# Altium PCB RoboRIOSPIBreakout.PcbDoc
Units mil, origin at the board's own origin, x right, y up, seen from the top; angles counter-clockwise.
Board outline 1041.34 x 1657.48 mil, 2 copper layers (Top Layer, Bottom Layer), stack 61.756 mil thick; 24 components, 16 nets, 90 pads, 13 vias.
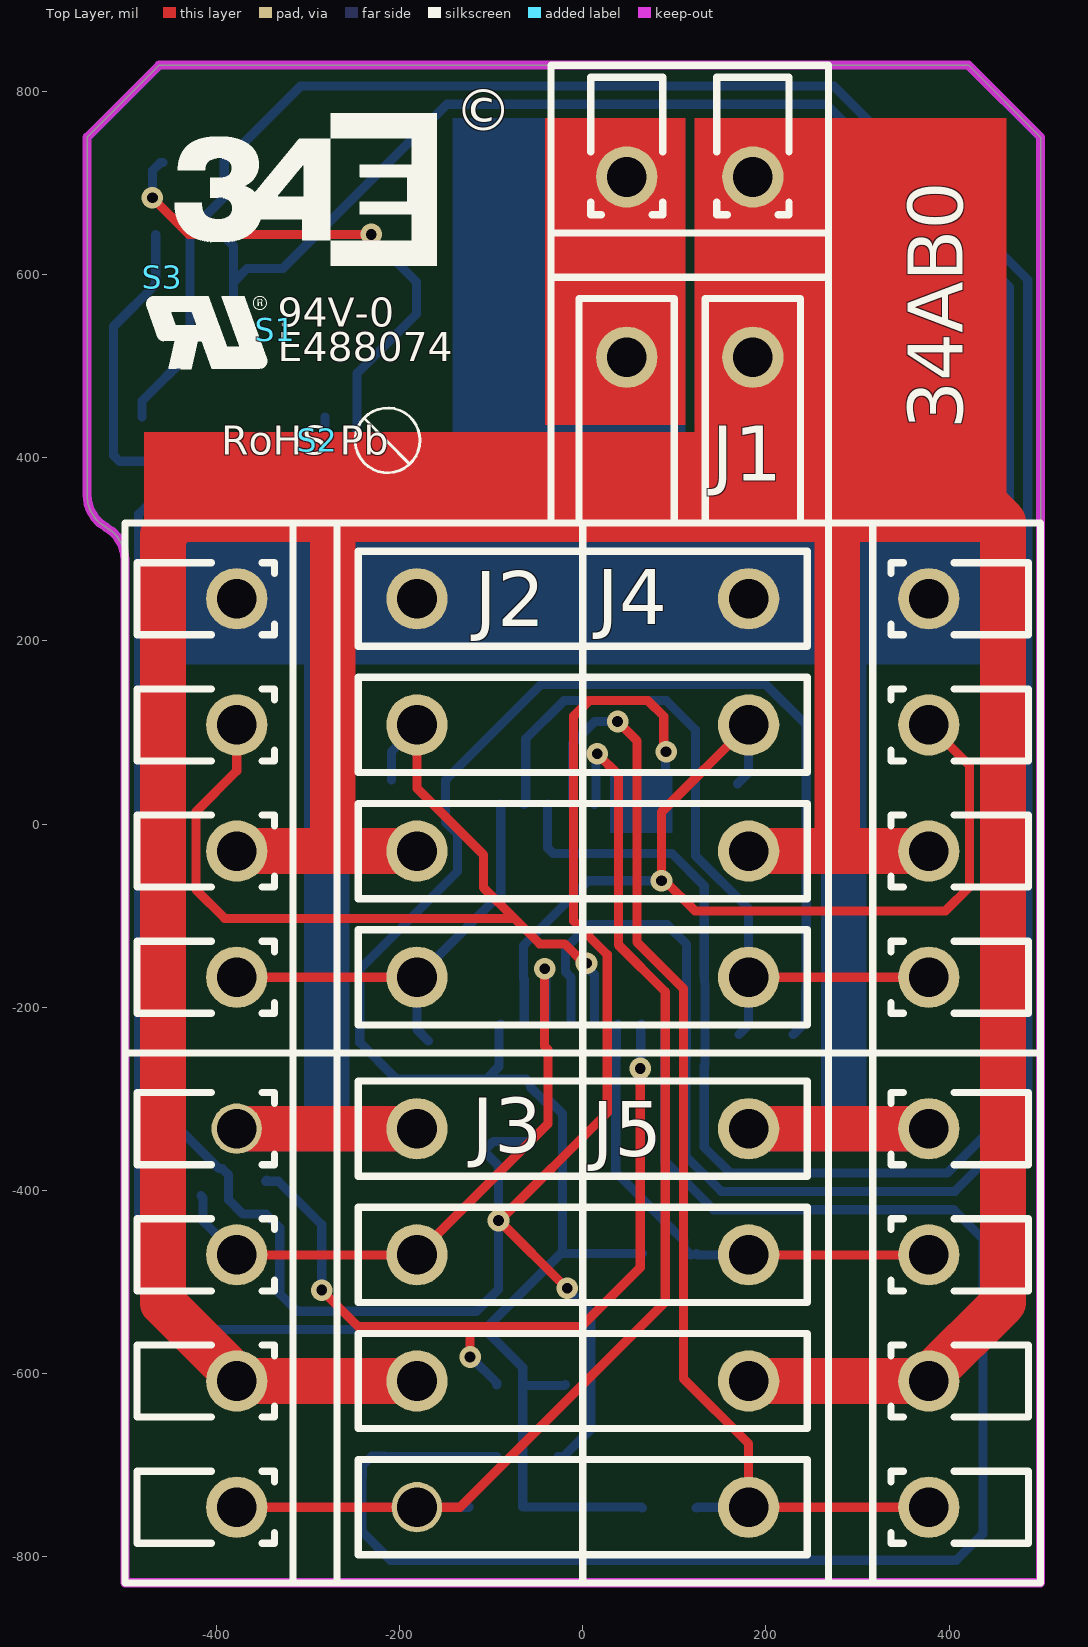
[diagram p0: Top Layer view]
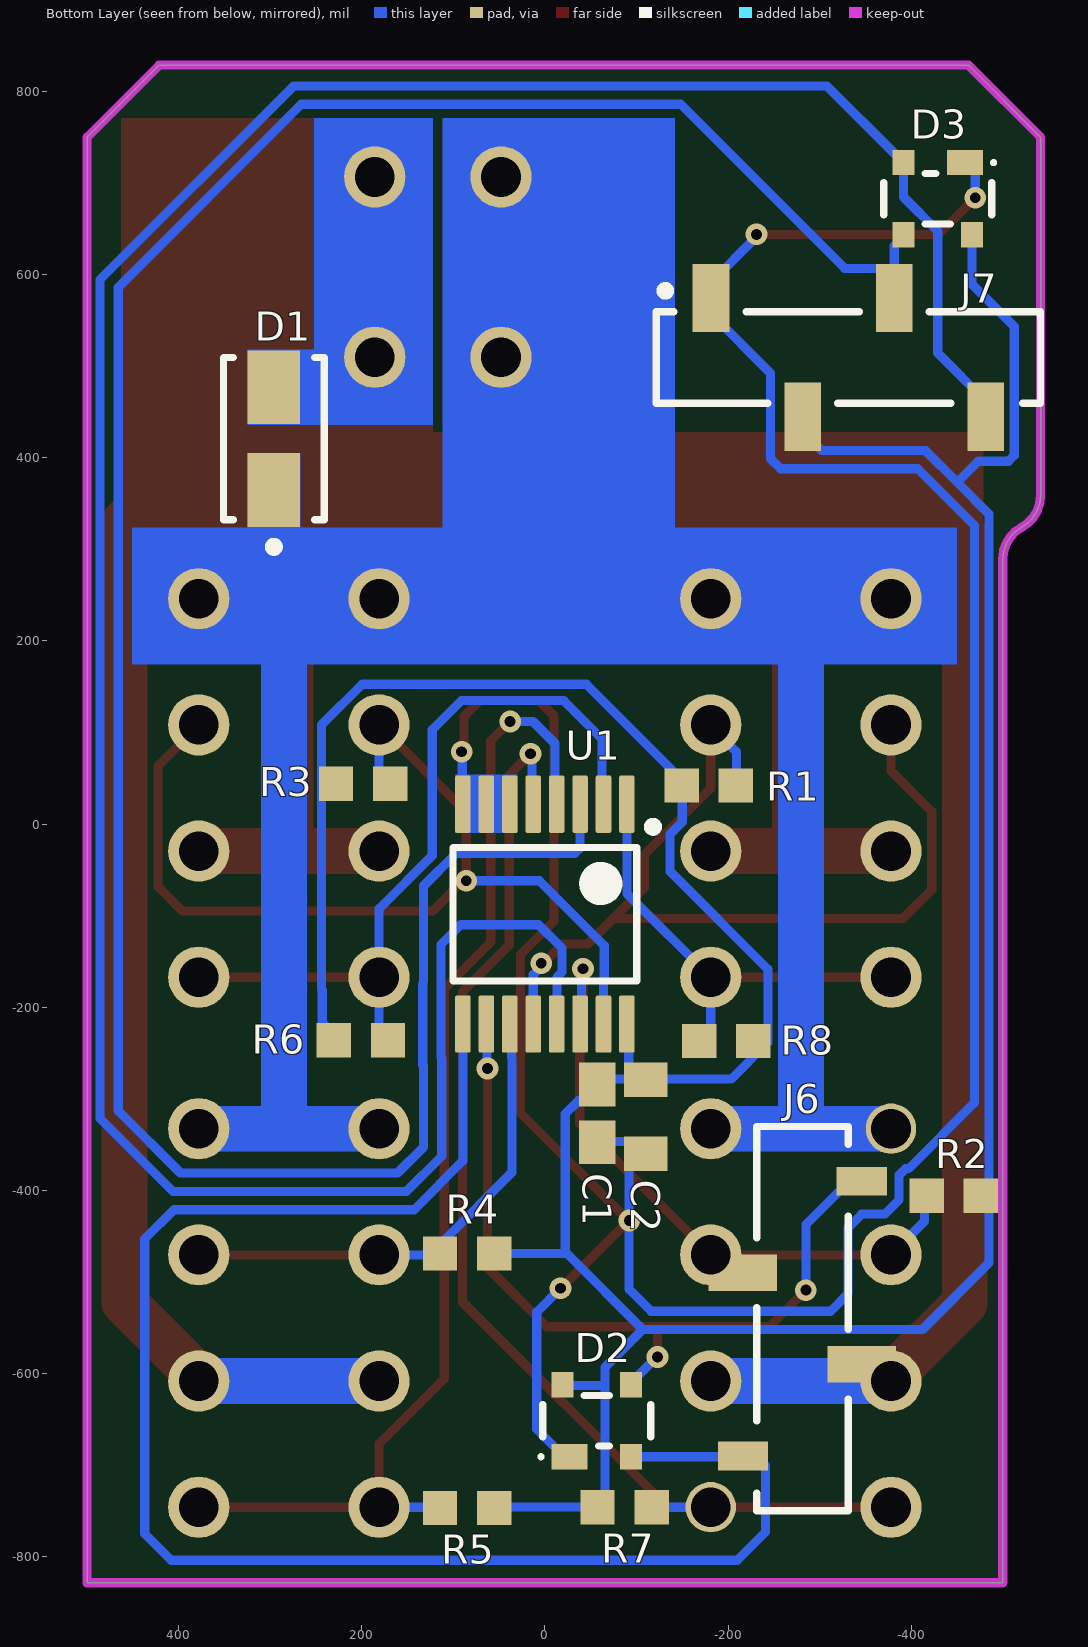
[diagram p1: Bottom Layer view, seen from below]
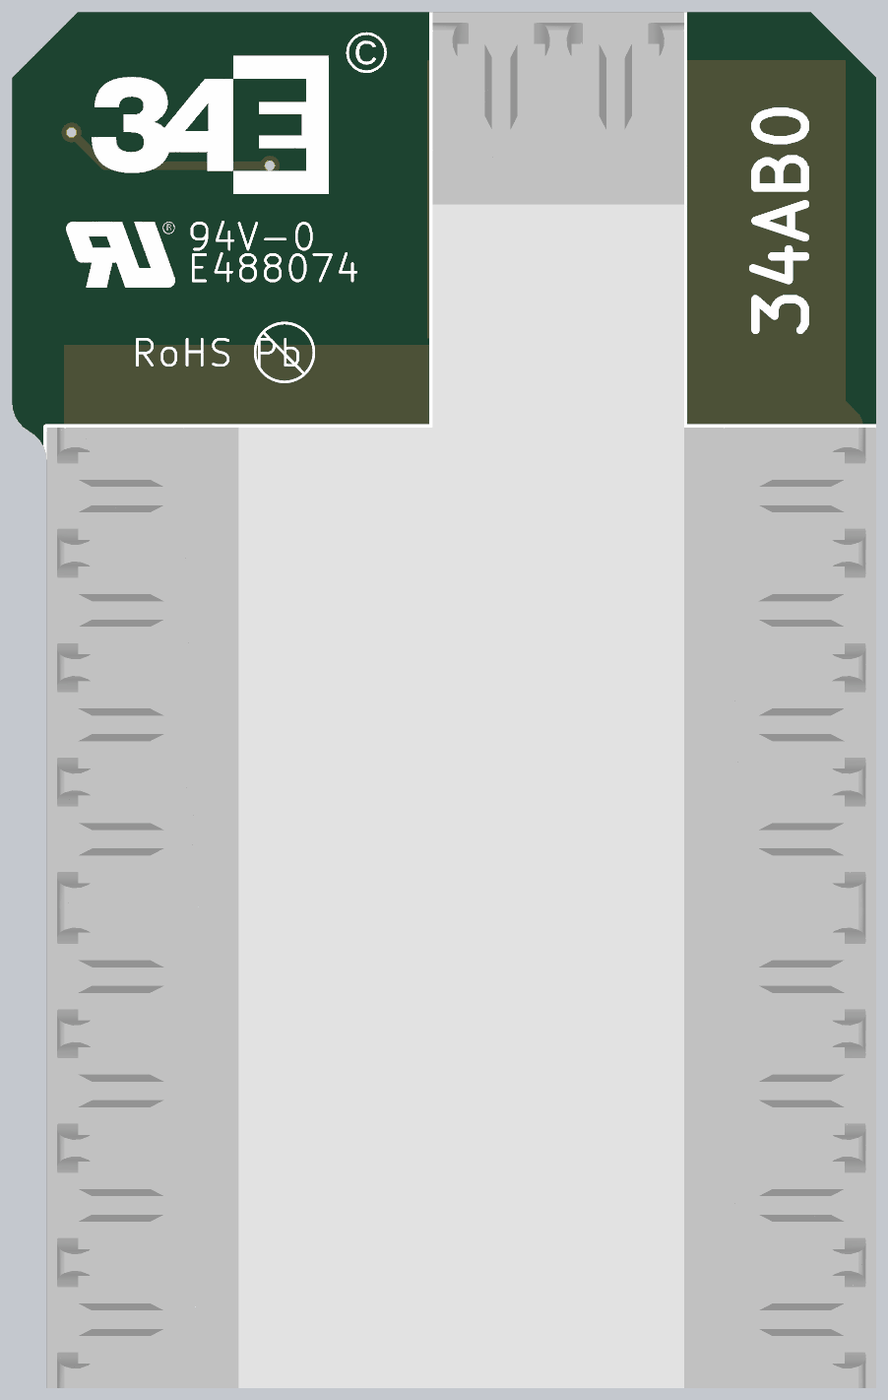
[diagram p2: 3D render of the assembled board from above, using the file's embedded part models]
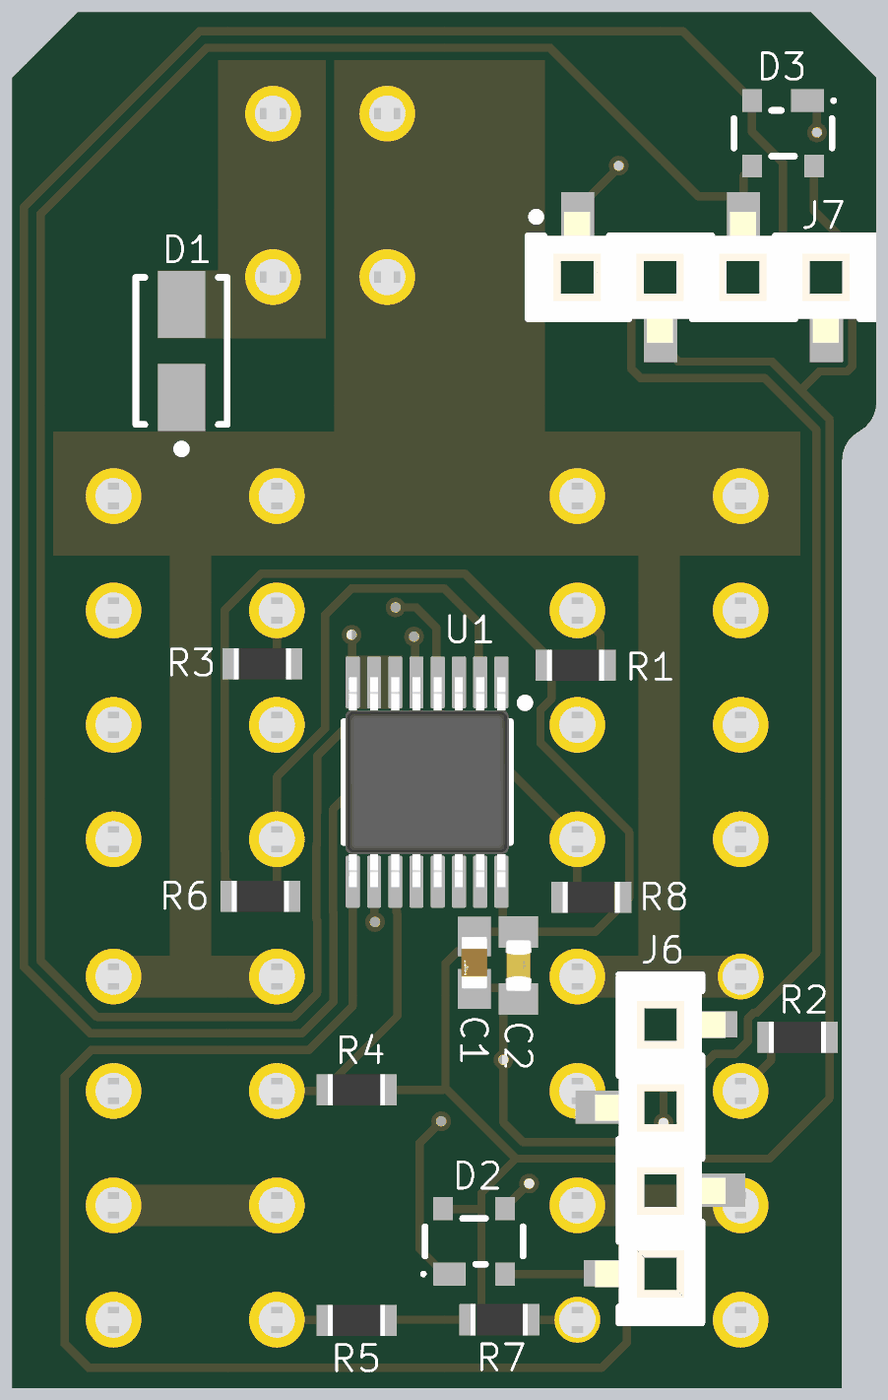
[diagram p3: 3D render of the assembled board from below, using the file's embedded part models]

## Layer stack, top to bottom
Top Solder: solder mask 1, SM-002, Dk 4
Top Layer: signal copper 1.378
Dielectric 1: core 59, Core-043, Dk 4.3
Bottom Layer: signal copper 1.378
Bottom Solder: solder mask 1, SM-002, Dk 4

## Board outline
-541.34,358.78 -540.43,350.37 -537.75,342.35 -533.42,335.09 -527.64,328.92 -520.67,324.13 -513.7,319.34 -507.92,313.17 -503.59,305.91 -500.91,297.89 -500,289.49 -500,-828.62 500,-828.62 500,750.12 421.26,828.86 -462.6,828.86 -541.34,750.12

## Design rules (kind name [scope] priority, off if disabled: settings)
BoardOutlineClearance [IsPolygon] p1: gap=1 ignorepadtopadclearanceinfootprint=FALSE
Clearance [All] p1: gap=6 ignorepadtopadclearanceinfootprint=FALSE
MinimumSolderMaskSliver [All] p1: minsoldermaskwidth=8
PolygonConnect [All] p1: connectstyle=Relief reliefconductorwidth=10 reliefentries=4 polygonreliefangle="90 Angle" airgapwidth=10
RoutingVias [All] p1: holewidth=28 width=50 viastyle="Through Hole" minholewidth=28 minwidth=50 maxholewidth=28 maxwidth=50
SilkToSilkClearance [All] p1: silktosilkclearance=0
SilkToSolderMaskClearance [IsPad] p1: minsilkscreentomaskgap=6 clearancetoexposedcopper=TRUE
SolderMaskExpansion SolderMaskExpansion_Via [IsVia] p1: expansion=2 istentingtop=TRUE
SolderMaskExpansion [Not IsVia] p2: expansion=2 istentingtop=FALSE
Width [All] p1: maxlimit=100 minlimit=10 preferedwidth=10 minimp=50.000000 maximp=50.000000 favimp=50.000000
27 further rules are at their usual default settings.

## Components (designator, comment, footprint, x,y, rotation, side; value= is the part's Value field where it differs from the comment)
C1 "10uF" FP-GRM188-0_1-e0_2_0_55-IPC_A -57.09,-316 r270 bottom locked
C2 "100nF" FP-CGA3E-0_3-0_1-IPC_A -110.24,-319.5 r270 bottom locked
D1 "SMAJ17CA-E3/61" VISH-DO-214AC-2_L 296,420.9 r90 bottom
D2 "PRTR5V0U2X,215" NXP-SOT143B-4_V -56.6,-651.63 r90 bottom
D3 "PRTR5V0U2X,215" NXP-SOT143B-4_V -429,683 r270 bottom
J1 "1885650000" LSF_SMT_3_5_135_02 116.87,578.74 r180 top locked
J2 "1885670000" LSF_SMT_3_5_135_04#1 -250,39.37 r270 top locked
J3 "1885670000" LSF_SMT_3_5_135_04#2 -250,-539.37 r270 top locked
J4 "1885670000" LSF_SMT_3_5_135_04#1 250,39.37 r90 top locked
J5 "1885670000" LSF_SMT_3_5_135_04#1 250,-539.37 r90 top locked
J6 "BG306-04-A-1-0400-L-B" BG306-04-A-1-0400-L-B#1 -281.26,-540.05 r90 bottom locked
J7 "BG306-04-A-1-0400-L-B" BG306-04-A-1-0400-L-B#2 -331.46,509.53 r180 bottom locked
R1 "4.7" RESC1608X55X30NL15T15 -179,42 r180 bottom
R2 "4.7" RESC1608X55X30NL15T15 -446.53,-406 r0 bottom
R3 "4.7" RESC1608X55X30NL15T15 198.53,44 r180 bottom
R4 "4.7" RESC1608X55X30NL15T15 85,-469 r0 bottom
R5 "4.7" RESC1608X55X30NL15T15 85,-747 r180 bottom
R6 "4.7" RESC1608X55X30NL15T15 201,-236 r0 bottom
R7 "4.7" RESC1608X55X30NL15T15 -87,-746 r0 bottom
R8 "4.7" RESC1608X55X30NL15T15 -198,-237 r180 bottom
S1 "" UL -336,540 r0 top
S2 "" RoHS -290,419 r0 top
S3 "" 34EngineeringLogo -459,597 r0 top
U1 "SN74LV4052APWR" PW0016A_M 0,-98.43 r270 bottom locked

## Footprints (in the part's own frame and the unit in brackets; to place one, negate y for a bottom-side part, rotate by r counter-clockwise, add the part's x,y. Pads: shape width x height; smd on the part's side, far side on the other; paste and mask are expansions set on the pad)
34EngineeringLogo [mil]
  silkscreen extent 13,13 299,179
BG306-04-A-1-0400-L-B#1 [mm]
  rect 0.8x1.4 smd: 1(-3.81,1.65) 4(3.81,-1.65)
  rect 1.02x1.9 smd: 2(-1.27,-1.65) 3(1.27,1.65)
  silkscreen extent -5.33,-1.27 5.33,1.27, body extent -5.35,-2 5.31,2, height 5.1
BG306-04-A-1-0400-L-B#2 [mm]
  rect 1.02x1.9 smd: 1(-3.81,1.65) 2(-1.27,-1.65) 3(1.27,1.65) 4(3.81,-1.65)
  silkscreen extent -5.33,-1.27 5.33,1.97, body extent -5.35,-2 5.31,2, height 5.1
FP-CGA3E-0_3-0_1-IPC_A [mm]
  rect 0.956x1.206 smd paste+0 mask+0: 1(-1.025,0) 2(1.025,0)
  body extent -0.8,-0.4 0.8,0.4, height 1.1
FP-GRM188-0_1-e0_2_0_55-IPC_A [mil]
  rect 47.57x39.85 smd paste+0 mask+0: 1(-31.57,0) 2(31.57,0)
  body extent -31,-16 31,16, height 36
LSF_SMT_3_5_135_02 [mm] "OMNIMATE Signal - Serie LSF  LSF-SMT 3.50/02/135 1.5"
  round 1.7 hole 1.1: A1(-1.75,1.75) A1(-1.75,-3.25) A2(1.75,1.75) A2(1.75,-3.25)
  silkscreen extent -3.85,-6.35 3.85,6.35, body extent -3.85,-6.35 3.85,6.35, height 13.17
LSF_SMT_3_5_135_04#1 [mm] "OMNIMATE Signal - Serie LSF  LSF-SMT 3.50/04/135 1.5"
  round 1.7 hole 1.1: A1(-5.25,1.75) A1(-5.25,-3.25) A2(-1.75,1.75) A2(-1.75,-3.25) A3(1.75,1.75) A3(1.75,-3.25) A4(5.25,1.75) A4(5.25,-3.25)
  silkscreen extent -7.35,-6.35 7.35,6.35, body extent -7.35,-6.35 7.35,6.35, height 13.17
LSF_SMT_3_5_135_04#2 [mm] "OMNIMATE Signal - Serie LSF  LSF-SMT 3.50/04/135 1.5"
  round 1.7 hole 1.1: A1(-5.25,1.75) A2(-1.75,1.75) A2(-1.75,-3.25) A3(1.75,1.75) A3(1.75,-3.25) A4(5.25,-3.25)
  round 1.4 hole 1.1: A1(-5.25,-3.25) A4(5.25,1.75)
  silkscreen extent -7.35,-6.35 7.35,6.35, body extent -7.35,-6.35 7.35,6.35, height 13.17
NXP-SOT143B-4_V [mm] "SOT143, 4-Leads, Body 3x1.4mm"
  rect 0.7x1 smd: 1(-1,0.75)
  rect 0.7x0.6 smd: 2(-1,-0.95) 3(1,-0.95) 4(1,0.95)
  silkscreen extent -1.05,-1.5 0.7,1.6, body extent -0.7,-1.5 0.7,1.5, height 1.1
PW0016A_M [mil] "SOP, 16-Leads, Body 5.1x4.5mm, Pitch 0.65mm, IPC Low Density"
  rrect22% 62.5x17 smd: 1(-120.08,89.57) 2(-120.08,63.98) 3(-120.08,38.39) 4(-120.08,12.8) 5(-120.08,-12.8) 6(-120.08,-38.39) 7(-120.08,-63.98) 8(-120.08,-89.57) 9(120.08,-89.57) 10(120.08,-63.98) 11(120.08,-38.39) 12(120.08,-12.8) 13(120.08,12.8) 14(120.08,38.39) 15(120.08,63.98) 16(120.08,89.57)
  silkscreen extent -100,-100 73,123, body extent -126,-98 126,98, height 39
RESC1608X55X30NL15T15 [mm] "Chip Resistor, 2-Leads, Body 1.75x0.95mm, IPC Medium Density"
  rect 0.95x0.95 smd: 1(-0.75,0) 2(0.75,0)
  body extent -0.87,-0.48 0.87,0.48, height 0.55
RoHS [mil]
  silkscreen extent 41,-35 112,35
UL [mil]
  silkscreen extent -141,-43 -9,37
VISH-DO-214AC-2_L [mm] "DO-214AC, 2-Leads, Body 4.5x2.79mm, IPC High Density"
  rect 2.05x1.45 smd: 1(-1.425,0) 2(1.425,0)
  silkscreen extent -3.12,-1.4 2.25,1.4, body extent -2.25,-1.4 2.25,1.4, height 2.29

## Part data
C1: library part CMP-2006-02792-2, "Chip Multilayer Ceramic Capacitors for General Purpose, 0603, 10uF, X5R, 15%, 20%, 6.3V", Case Code (Imperial)=0603, Case Code (Metric)=1608, Dielectric=X5R, Max Operating Temperature=85°C, Min Operating Temperature=-55°C, Package Quantity=4000, Tolerance=20%, Voltage=6.3V, Capacitance=10uF, Case/Package=0603, Depth=0.8mm, Height=0.8mm, Lead Free="Lead Free", Length=1.6mm, Material=Ceramic, Mount="Surface Mount", Packaging="Tape and Reel", Radiation Hardening=No, REACH SVHC="No SVHC", Termination=SMD/SMT, Thickness=0.035inch, Voltage Rating=6.3V, Voltage Rating (DC)=6.3V, Width=0.031inch
C2: library part CMP-2000-07546-2, "Cap Ceramic 100nF 50V X7R 10% Pad SMD 0603 +125°C Automotive T/R", Case Code (Imperial)=0603, Case Code (Metric)=1608, Dielectric=X7R, Max Operating Temperature=125°C, Min Operating Temperature=-55°C, Package Quantity=1, Ratings=AEC-Q200, Tolerance=10%, Voltage=50V, Capacitance=100nF, Case/Package=0603, Composition=Ceramic, Depth=0.8mm, Height=0.8mm, Lead Free="Lead Free", Length=1.6mm, Mount="Surface Mount", Packaging="Tape and Reel", Radiation Hardening=No, REACH SVHC="No SVHC", Termination=SMD/SMT, Thickness=0.035inch, Voltage Rating=50V, Voltage Rating (DC)=50V, Weight=7.1E-05oz, Width=0.8mm
D1: library part CMP-0548-00179-2, "Transient Voltage Suppressor, 6.40 to 231 V, 17 V Stand-off Voltage, Bi-Directional, -55 to 155 degC, 2-pin DO-214AC, Pb-Free, Tape and Reel", Manufacturer="Vishay Semiconductor", Operating Junction and Storage Temperature Range="-55 to 150 degC", ComponentLink1Description="Manufacturer URL", ComponentLink1URL=http://www.vishay.com/, ComponentLink2Description=Datasheet, ComponentLink2URL=http://www.vishay.com/docs/88390/smaj50a.pdf, ComponentLink3Description="Package Specification", ComponentLink3URL=http://www.vishay.com/docs/88390/smaj50a.pdf, DatasheetVersion=12/8/2013, ID (uA)=2, IFSM="40 A", Mounting Technology="Surface Mount", PackageDescription="2-Pin DO-214AC (SMA), Body 4.245 x 2.665 mm", PackageReference=DO-214AC-2, Packing="Tape and Reel", PartNumber=SMAJ17CA-E3/61, PPPM (W)="400, 300", RoHS=TRUE, VBR Bi-Directional (V)="6.4 to 231", VWM (V)=17
D2 D3: library part CMP-2000-05285-1, "Ultra Low Capacitance Double Rail-to-Rail ESD Protection Diode, 5.5 V, 1 pF, -40 to 85 degC, 4-Pin SOT143B, RoHS, Tape and Reel", Capacitance Value=16pF, ESD Protection Voltage=8KV@ContactDisc, Leakage Current=0.1uA, Manufacturer="NXP Semiconductors", Operating Temp Range=-40Cto85C, Operating Temperature Classification=Industrial, Operating Temperature Max Deg. C=85C, Operating Temperature Min Deg. C=-40C, Package / Case=SOT, Reverse Breakdown Voltage=6V, Reverse Stand-off Voltage=5.5V, Configuration=Quad, Datasheet URL=https://datasheet.ciiva.com/4479/prtr5v0u2x-102853-4479461.pdf, Datasheet Version="Rev. 02, 01/2008", Direction Type=Uni-Directional, Leakage Current (Max)=0.1uA, Manufacturer URL=http://www.nxp.com/, Mounting=SurfaceMount, Mounting Style=SurfaceMount, Number of Elements=1, Package Type=SOT, Packaging=TapeandReel, Pin Count=3+Tab, Polarity=Uni-Directional, Product Depth (mm)=1.4mm, Product Height (mm)=1mm, Product Length (mm)=3mm, Rad Hardened=No, Suppressor Type=DiodeArrays, Working Voltage=5.5V, Working Voltage (Max)=5.5V
J1: library part CMP-1559-02079-1, "OMNIMATE Signal - series LSF", Colour=Black, Manufacturer=Weidmueller, Rated_current_min_no_of_poles_TU_20_deg_C="17,5 A", Rated_current_use_group_B_UL_1059="12 A", Rated_voltage_for_surge_voltage_class_pollution_degree_II_2="320 V", Rated_voltage_use_group_B_UL_1059="300 V", UL_94_flammability_rating=V-0, ComponentLink1Description="Manufacturer URL", ComponentLink1URL=http://www.weidmueller.com/, ComponentLink2Description="URL Link1", ComponentLink2URL=http://catalog.weidmueller.com/catalog/Start.do?localeId=en&ObjectID=1885650000, Contact_material=Cu-Leg, Contact_surface=tinned, Insulating_material="LCP GF", Mounting_onto_the_PCB="Reflow solder connection", No_of_poles=2, PackageReference=LSF_SMT_3_5_135_02, Packaging=Tube, PartNumber=1885650000, Pitch_inch="0,138 inch", Pitch_mm="3,5 mm", Qty="71 PCS", Revision=V1, Short_text_for_material="LSF-SMT 3.50/02/135 3.5SN BK TU", Side_termination_characteristic="closed side", Solder_pin_length_mm="3,5 mm", Solid_max_H05_07_V_U="1,5 mm²", Solid_min_H05_07_V_U="0,2 mm²", Wire_cross_section_AWG_max_UL_1059="AWG 16", Wire_cross_section_AWG_min_UL_1059="AWG 24"
J2 J3 J4 J5: library part CMP-1559-02097-1, "OMNIMATE Signal - series LSF", Colour=Black, Manufacturer=Weidmueller, Rated_current_min_no_of_poles_TU_20_deg_C="17,5 A", Rated_current_use_group_B_UL_1059="12 A", Rated_voltage_for_surge_voltage_class_pollution_degree_II_2="320 V", Rated_voltage_use_group_B_UL_1059="300 V", UL_94_flammability_rating=V-0, ComponentLink1Description="Manufacturer URL", ComponentLink1URL=http://www.weidmueller.com/, ComponentLink2Description="URL Link1", ComponentLink2URL=http://catalog.weidmueller.com/catalog/Start.do?localeId=en&ObjectID=1885670000, Contact_material=Cu-Leg, Contact_surface=tinned, Insulating_material="LCP GF", Mounting_onto_the_PCB="Reflow solder connection", No_of_poles=4, PackageReference=LSF_SMT_3_5_135_04, Packaging=Tube, PartNumber=1885670000, Pitch_inch="0,138 inch", Pitch_mm="3,5 mm", Qty="37 PCS", Revision=V1, Short_text_for_material="LSF-SMT 3.50/04/135 3.5SN BK TU", Side_termination_characteristic="closed side", Solder_pin_length_mm="3,5 mm", Solid_max_H05_07_V_U="1,5 mm²", Solid_min_H05_07_V_U="0,2 mm²", Wire_cross_section_AWG_max_UL_1059="AWG 16", Wire_cross_section_AWG_min_UL_1059="AWG 24"
J6 J7: "CONNECTOR, SOCKET, 4 POSITION, 1 ROW, 2.54MM; Product Range:White Lite BG306 Series; Contact Termination Type:Surface Mount; Gender:Receptacle; No. of Contacts:4; Pitch Spacing:2.54mm; Contact Plating:Gold Plated Contacts ;RoHS Compliant: Yes", Manufacturer="Global Connector Technology", Supplier Part Number 1=24AC7654, Category=Connectors, ComponentLink1Description=https://datasheet.ciiva.com/16287/bg306-16287424.pdf?src-supplier=Future+Electronics, ComponentLink1URL=https://datasheet.ciiva.com/16287/bg306-16287424.pdf?src-supplier=Future+Electronics, ComponentLink2Description=https://datasheet.ciiva.com/46431/1841849-46431774.pdf?src-supplier=Element14, ComponentLink2URL=https://datasheet.ciiva.com/46431/1841849-46431774.pdf?src-supplier=Element14, Contact Material=Bronze, Contact Plating=Gold, Gender=Receptacle, Lead Free="Lead Free", Manufacturer Part Number=BG306-04-A-1-0400-L-B, Mount="Surface Mount", Number of Contacts=4, Number of Positions=4, Number of Rows=1, Pitch=2.54mm, Pricing 1="10=1.15000, 100=0.90500, 250=0.82600, 500=0.75400, 1000=0.70200 (USD)", REACH SVHC="No SVHC", RoHS=Yes, RoHS Compliant=Yes, Series=BG306, Stock 1=456, Supplier 1=Newark, Termination=SMD/SMT
R1 R2 R3 R4 R5 R6 R7 R8: library part CMP-1012-00586-3, "Precision Thick Film Chip Resistor, 4.7 KOhm, +/- 1%, -55 to 155 degC, 0603 (1608 Metric), RoHS, Tape and Reel", Case Code (Imperial)=1206, Case Code (Metric)=3216, Case\Package=1205, Max Operating Temperature="125 degC", Min Operating Temperature="-55 degC", Package Quantity=1, Power Rating="250 mW", Resistance="220 Ohm", Tolerance=5%, Type (Resistor)="Thick Film", Voltage Rating="50 V", ComponentLink1Description="Manufacturer URL", ComponentLink1URL=http://www.panasonic.com/, ComponentLink2Description=Datasheet, ComponentLink2URL=http://industrial.panasonic.com/cdbs/www-data/pdf/RDA0000/AOA0000C86.pdf, DatasheetVersion=Apr-15, Elements=4, Height="0.024 inch", Length="0.126 inch", Mount="Surface Mount", PackageDescription="2-Pin Surface Mount Device, Body 1.6 x 0.85 mm", PackageReference=0603, Packaging="Tape and Reel", Pins=8, Radiation Hardening=No, REACH SVHC="No SVHC", RoHSCompliant=true, Width="0.063 inch"
S1: library part UL
S2: library part RoHS
S3: library part 34EngineeringLogo, "34 Engineering Silkscreen Logo"
U1: library part CMP-0802-00041-4, "Dual 4-Channel Analog Multiplexer/Demultiplexer, PW0016A, LARGE T&R", Generic Part Number=SN74LV4052A, Manufacturer="Texas Instruments", Operating Temperature Range(C)="-40 to 85", Rating=Catalog, Bandwidth(Max)(MHz)=50, Code_JEDEC=MO-153, Configuration="2 X 1：4 MUX", Crosstalk=Yes, DatasheetVersion=SCLS429J, Output Type=CMOS, PackageReference=PW0016A, PackageVersion=http://www.ti.com/lit/ml/mpds361/mpds361.pdf, Ron(Max)(Ohms)=75, Ron(Typ)(Ohms)=25, VCC(Max)(V)=5.5, VCC(Min)(V)=2

## Via types
v1: diameter 23.62, hole 11.81, Top Layer to Bottom Layer, tented both sides, 13 vias

## Nets (pads, with @x,y where several pads share a name; then routed paths per layer and width w, separated by ;. In a path a pad name is that pad's centre, name@x,y a point inside that pad or via, vN(x,y) a via of type N, cw(c..) or ccw(c..) an arc to the next point about the centre after c; other vN are vias at no path point)
12_GND: D1.2 J1.A1 J2.A3 J3.A3 J4.A2 J5.A2 J6.2 | length 4115.6
  Top Layer w50: -453,321 -458.42,315.58 -458.42,-523.22 -377.95,-603.69 -377.95,-608.27 J3.A3@-181.1,-608.27 ; J2.A3@-377.95,-29.53 -273,-29.53 ; -343.84,377 -273,377 -273,-29.53 ; J2.A3@-181.1,-29.53 -273,-29.53 ; J5.A2@181.1,-608.27 377.95,-608.27 377.95,-603.69 459,-522.64 459,330 409,380 409,406.23 ; J4.A2@181.1,-29.53 278,-29.53 ; 278,394 278,-29.53 ; J4.A2@377.95,-29.53 278,-29.53
  Bottom Layer w50: J3.A3@-377.95,-608.27 J3.A3@-181.1,-608.27 ; J5.A2@181.1,-608.27 J5.A2@377.95,-608.27
+3.3: C1.1 C2.1 D2.4 D3.4 J7.2 R1.1 R2.1 R3.1 R4.1 R5.2 R6.2 R7.2 R8.2 U1.16 | length 4024.1
  Bottom Layer w10: D3.4 -466.4,589.49 -512.54,543.35 -512.54,402.62 -506.1,396.17 -473.17,396.17 -450.25,373.25 ; J7.2 -281.46,427.25 -296.54,412.17 -298.22,412.17 -302.4,408 -415.5,408 -450.25,373.25 ; U1.16 -91.49,-220.43 -91.49,-264.72 C2.1@-105.31,-278.54 ; D2.4 -19.94,-613 -65.47,-613 ; R5.2@64.94,-747 63.94,-746 -65.47,-746 -65.47,-613 ; R4.1@65,-469 -20.32,-469 -22.16,-467.16 ; R6.2@229.53,-230 243.23,-216.3 243.23,-181.77 244,-181 244,108.25 199.52,152.73 -45.27,152.73 -150,48 -150,2.25 -136.64,-11.11 -136.64,-51.64 -243.53,-158.53 -243.53,-238.47 -203.46,-278.54 C2.1@-105.31,-278.54 ; -450.25,373.25 -485,338.5 -485,-479.28 -412.28,-552 -107,-552 ; -107,-552 -22.16,-467.16 ; -107,-552 -65.47,-593.53 -65.47,-613 ; C2.1@-105.31,-278.54 -61.93,-278.54 -57.09,-283.39 -57.09,-287.26 -42.16,-302.18 -36.62,-302.18 -36.3,-302.5 -36.19,-302.5 -22.16,-316.53 -22.16,-467.16
+12: D1.1 J1.A2 J2.A1 J3.A1 J4.A4 J5.A4 | length 1919.9
  Top Layer w50: J3.A1@-377.95,-332.68 J3.A1@-181.1,-332.68 ; J5.A4@181.1,-332.68 J5.A4@377.95,-332.68
  Bottom Layer w50: J3.A1@-377.95,-332.68 J3.A1@-181.1,-332.68 ; -279.53,-311 -279.53,246.06 ; J5.A4@181.1,-332.68 J5.A4@377.95,-332.68 ; 285,-316 285,246.06
  Bottom Layer w100: 49,383 46,383 45,384 54,384
CAM1_SCL: J2.A4 R8.1 U1.1 | length 498.6
  Top Layer w10: J2.A4@-377.95,-167.32 J2.A4@-181.1,-167.32
  Bottom Layer w10: R8.1 -181.1,-224.37 -181.1,-167.32 -89.57,-75.79 U1.1
CAM1_SDA: J2.A2 R1.2 U1.12 | length 1055.2
  Top Layer w10: J2.A2@-377.95,108.27 -377.95,58.05 -422.42,13.58 -422.42,-71.58 -391,-103 -74.92,-103 ; J2.A2@-181.1,108.27 -181.1,39.01 -108.47,-33.62 -108.47,-69.45 -74.92,-103 ; v1(4,-152) 1.39,-152 -19.8,-130.81 -47.11,-130.81 -74.92,-103
  Bottom Layer w10: R1.2@-209.06,48 -209.06,79.03 -181.1,106.99 J2.A2@-181.1,108.27 ; v1(4,-152) 4,-155.69 12.8,-164.48 U1.12
CAM2_SCL: J3.A4 R7.1 U1.5 | length 1303.4
  Top Layer w10: J3.A4@-377.95,-746.06 -181.1,-746.06 -134.06,-746.06 90,-522 90,-183.11 39,-132.11 39,53.58 v1(15.75,76.83)
  Bottom Layer w10: J3.A4@-181.1,-746.06 -124.59,-746.06 R7.1@-124.53,-746 ; U1.5 14.27,23.13 14.27,75.36 v1(15.75,76.83)
CAM2_SDA: J3.A2 J6.3 R2.2 U1.14 | length 712.6
  Top Layer w10: J3.A2@-377.95,-470.47 -181.1,-470.47 -38,-327.37 -38,-246.34 -41.62,-242.72 v1(-41.62,-158)
  Bottom Layer w10: R2.2 -414.58,-408.42 -414.58,-433.84 J3.A2@-377.95,-470.47 ; v1(-41.62,-158) -40,-159.62 -40,-216.89 U1.14
CAM3_SCL: J4.A1 R6.1 U1.2 | length 846.2
  Top Layer w10: J4.A1@181.1,-167.32 J4.A1@377.95,-167.32
  Bottom Layer w10: U1.2 -62.24,23.39 -62.24,93.13 -20.56,134.81 91.19,134.81 123,103 123,-34.31 181.1,-92.41 181.1,-167.32 181.1,-219.37 R6.1@170.47,-230
CAM3_SDA: J4.A3 R3.2 U1.15 | length 1101.4
  Top Layer w10: J4.A3@181.1,108.27 86,13.17 v1(86,-62) 89.69,-62 122.69,-95 396,-95 422.42,-68.58 422.42,63.8 J4.A3@377.95,108.27
  Bottom Layer w10: U1.15 -63.99,-169.93 -64.81,-169.11 -64.81,-132.81 6,-62 v1(86,-62) ; R3.2 181.1,56.1 J4.A3@181.1,108.27
CAM4_SCL: J5.A1 R5.1 U1.4 | length 1297.7
  Top Layer w10: v1(38,112) 59.19,90.81 59.19,-128.99 110,-179.8 110,-605.71 181.1,-676.81 181.1,-746.06 J5.A1@377.95,-746.06
  Bottom Layer w10: U1.4 -11.06,23.39 -11.06,87.94 13,112 v1(38,112) ; R5.1@124,-747 124.94,-746.06 J5.A1@181.1,-746.06
CAM4_SDA: J5.A3 R4.2 U1.11 | length 541.5
  Top Layer w10: J5.A3@181.1,-470.47 J5.A3@377.95,-470.47
  Bottom Layer w10: U1.11 36.65,-220.24 36.65,-255.19 35.95,-255.89 35.95,-380.45 110.36,-454.86 110.36,-462.83 R4.2@118,-470.47 ; R4.2@124.06,-469 125.53,-470.47 J5.A3@181.1,-470.47
GND: C1.2 C2.2 D2.1 D3.1 J7.1 U1.6 U1.7 U1.8 | length 3382
  Top Layer w10: v1(-470,684) -430,644 v1(-231,644) ; v1(-17,-507) -17.5,-507 -91.5,-433 v1(-92,-433) -91.5,-433.5 26.81,-315.19 26.81,-142.55 -10,-105.74 -10,118 6.81,134.81 71.19,134.81 88.39,117.61 88.39,81.61 v1(91,79)
  Bottom Layer w10: v1(-470,684) -470,713.59 -461.22,722.37 D3.1 ; v1(-231,644) -231,641.36 -181.46,591.82 J7.1 -181.46,557.17 -246.38,492.25 -246.38,398.97 -257.35,388 -407.21,388 -469,326.21 -469,-304.51 -397.21,-376.3 -393.74,-376.3 -386.75,-383.29 -386.75,-410.35 -371.09,-426.01 -345.99,-426.01 -331,-441 -331,-513 -312,-532 -116,-532 -92,-508 v1(-92,-433) -92,-373.07 -105.82,-359.25 -110.24,-359.25 -97.51,-346.53 -57.09,-346.53 C1.2@-57.09,-350.39 ; D2.1 -21.17,-691 9,-660.83 9,-533 v1(-17,-507) ; U1.8 90.28,22.37 90.28,78.28 v1(91,79)
GPIO0: D2.3 J6.4 U1.10 | length 886.9
  Top Layer w10: v1(-285,-509) -245,-549 -123,-549 ; v1(-123,-582) -123,-549 ; v1(62.76,-267) 62.76,-484.24 -2,-549 -123,-549
  Bottom Layer w10: J6.4@-345.17,-389 J6.4 -332.44,-390.05 -285,-437.49 v1(-285,-509) ; v1(-123,-582) -122.29,-582 -94,-610.29 D2.3 ; v1(62.76,-267) 63.37,-266.39 63.37,-219.11 U1.10
GPIO1: D2.2 J6.1 U1.9 | length 1780.8
  Bottom Layer w10: D2.2 -215.35,-691 J6.1 -230.06,-690.05 -240.8,-700.8 -240.8,-712.03 -241,-712.23 -241,-773 -210,-804 408,-804 437,-775 437,-453 405.14,-421.14 142.86,-421.14 89.57,-367.85 U1.9
RIO_SCL: D3.3 J7.3 U1.3 | length 2878
  Bottom Layer w10: D3.3 -391.6,641.66 -381.46,631.52 J7.3@-381.46,591.82 ; J7.3 J7.3@-381.46,591.82 ; U1.3 -38.39,-26.14 -32.53,-32 97,-32 132.62,-67.62 132.68,-156.54 132.68,-165.35 ccw(c181.1,-167.32) 133.43,-176.03 133.43,-263.36 132.64,-264.14 132.64,-352.75 161.03,-381.14 398.03,-381.14 466,-313.17 466,586 266,786 -148.21,786 -327.32,606.9 -366.38,606.9 J7.3@-381.46,591.82
RIO_SDA: D3.2 J7.4 U1.13 | length 3122.7
  Bottom Layer w10: J7.4 -481.46,461.9 -428.99,514.37 -428.99,647.39 -391.6,684.78 D3.2 -391.6,724.34 -384.79,731.15 -382.82,731.15 -307.97,806 274.28,806 486,594.28 486,-321.45 406.31,-401.14 151.14,-401.14 112.64,-362.64 112.64,-258.96 112.64,-255.86 113.43,-255.07 113.43,-131.43 92,-110 7,-110 -18.81,-135.81 -18.81,-161.45 -13,-167.26 -13,-218.3 U1.13

## Keep-outs
Keep-Out Layer:
  the board outline again, w10

## Other copper
Top Layer:
  rectangle net 12_GND: 122,308 463,771
  rectangle net 12_GND: -479,308 265,428
  rectangle net +12: -41,436 112,771
Bottom Layer:
  rectangle net 12_GND: 229,436 325,518
  rectangle net +12: 267,311 325,405
  rectangle net GND: 30,-10 98,54
  rectangle net +12: -450,174 451,324
  rectangle net +12: -142,197 112,771
  rectangle net 12_GND: 122,436 252,771

## Silkscreen, mask and mechanical layers (free items; w line width, h text height)
Top Overlay:
  text "34AB0" at 415,431 h60 r90
Mechanical 15:
  circle w10: c0,0 r35.36

## Text inside footprints (layer, text, board x,y; h text height)
S1: Top Overlay "94V-0" at -332.85,543.15 h31.5; Top Overlay "E488074" at -332.85,505.36 h31.5
S2: Top Overlay "RoHS Pb" at -394.95,403.26 h31.5
S3: Top Overlay "©" at -139.93,741.67 h78.74